# EAGLE board polarization_switch_mid (EAGLE 9.6.2)
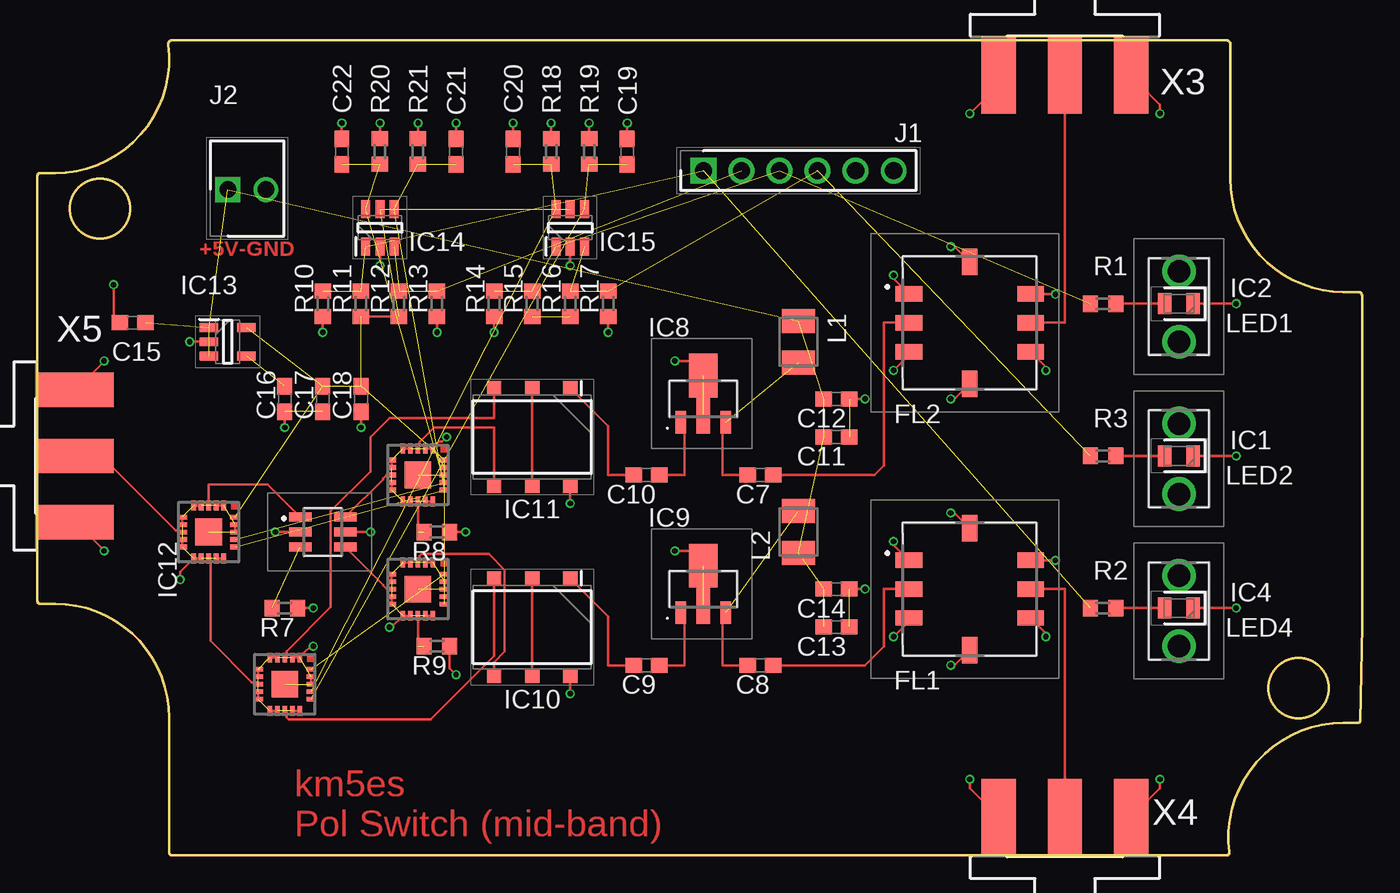
[diagram p0: board, top side]
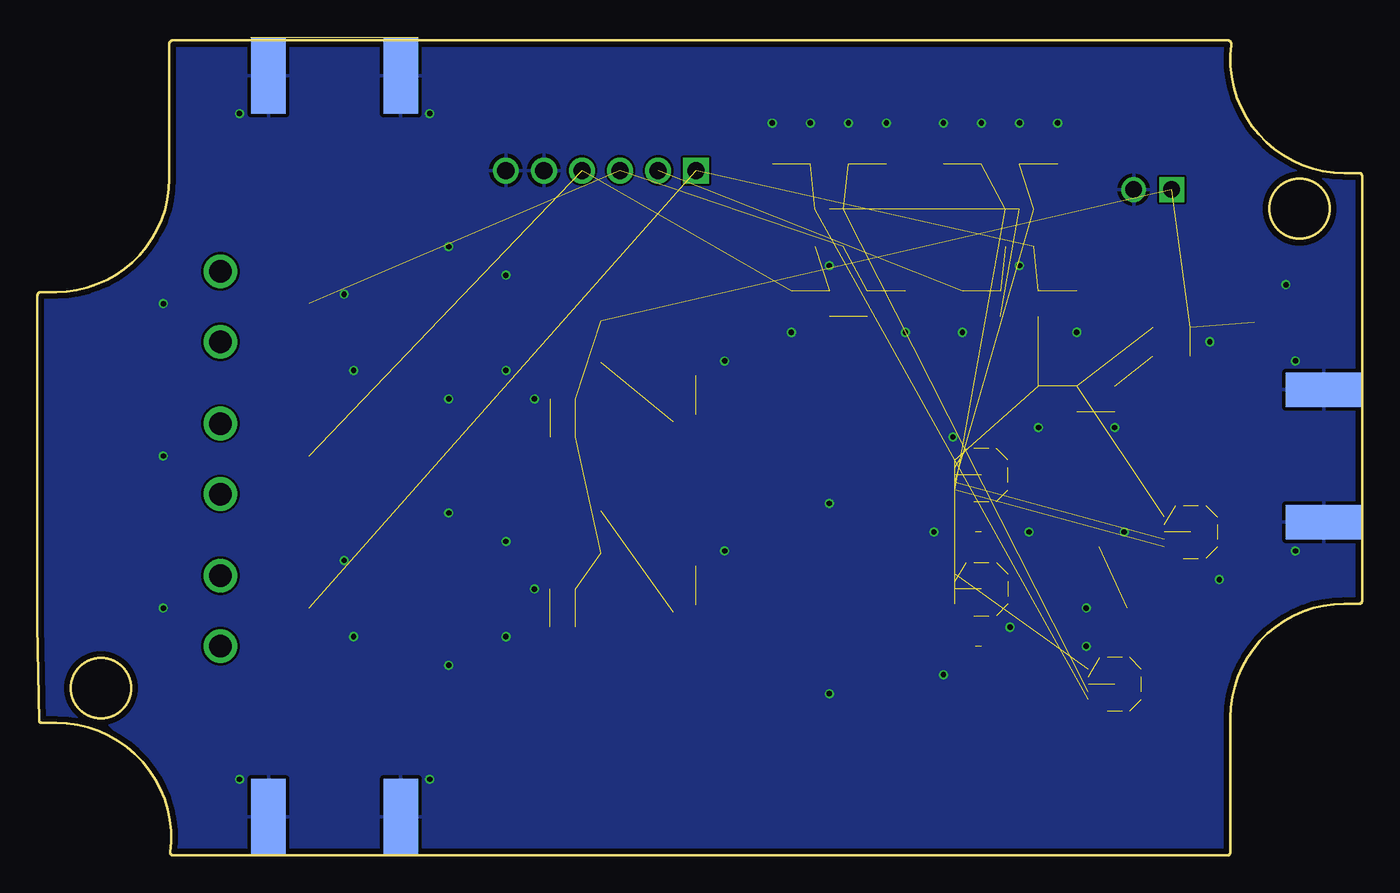
[diagram p1: board, bottom side, seen from below]

Size 88.42 x 54.42 mm. Coordinates in mm from the lower left corner, seen from the top.
Outline: 1.18,45.55 0.18,45.55 arc90 0,45.38 0,16.98 arc90 0.18,16.8 1.18,16.8 arc-90 8.8,9.18 8.8,0.18 arc90 8.98,0 79.38,0 arc97 79.55,0.2 arc-97 87.18,8.86 88.18,8.86 arc89 88.29,8.97 88.42,15.34 88.42,37.38 arc90 88.18,37.62 87.18,37.62 arc-90 79.62,45.18 79.62,54.18 arc90 79.38,54.42 8.98,54.42 arc99 8.74,54.14 arc-97 1.18,45.55
Outline: circle at 84.18,11.18 radius 2
Outline: circle at 4.18,43.18 radius 2
Copper layers (1*16): Top 0.035559375mm / dielectric 1.6mm / Bottom 0.035559375mm
Design rules "oshpark-2layer": minimum track width 6mil, minimum drill 10mil, track to track 6mil, track to pad 6mil, pad to pad 6mil, via to via 6mil, smd to smd 6mil, copper to edge 15mil, drill to drill 6mil, minimum pad ring 5mil, minimum via ring 5mil, stop-mask expansion 2.5mil, vias tented up to drill 0mil, thermal gap 10mil

## Footprints (pad centres in the part's own frame; a part is rotated, then mirrored left to right if it is on the bottom)
C0603 = smd 1.1 x 1: 1 -0.85,0; 2 0.85,0
RBP135 = smd 1.02 x 1.78: 1 -1.93,-4.065; 2 0,-4.065; 3 1.93,-4.065; 5 1.93,4.065; 6 0,4.065; 7 -1.93,4.065 | smd 1.78 x 1.02: 4 4.065,0; 8 -4.065,0
VLPR248582 = drill 1.5 pad 2.25: 1 0,0; 2 0,4.7
DG983-1 = smd 0.66 x 0.31: 1 -1.775,1; 2 -1.775,0.5; 3 -1.775,0; 4 -1.775,-0.5; 5 -1.775,-1; 11 1.775,-1; 12 1.775,-0.5; 13 1.775,0; 14 1.775,0.5; 15 1.775,1 | smd 0.31 x 0.66: 6 -1,-1.775; 7 -0.5,-1.775; 8 0,-1.775; 9 0.5,-1.775; 10 1,-1.775; 16 1,1.775; 17 0.5,1.775; 18 0,1.775; 19 -0.5,1.775; 20 -1,1.775 | smd 1.78 x 1.78: X 0,0
PHA13LN = smd 0.71 x 1.5: 1 -1.5,-1.56; 3 1.5,-1.56 | smd 0.91 x 2.5: 2 0,-1.06 | smd 1.91 x 2.92: 4 0,1.56
SOTFL254P691X411-6N = smd 0.935 x 0.96: 1 -3.262,2.54; 2 -3.262,0; 3 -3.262,-2.54; 4 3.262,-2.54; 5 3.262,0; 6 3.262,2.54
QCV151 = smd 0.6 x 1.5: 1 1,1.5; 2 0,1.5; 3 -1,1.5; 4 -1,-1.5; 5 0,-1.5; 6 1,-1.5
SOT95P280X145-5N = smd 1.25 x 0.6: 1 -1.25,0.95; 2 -1.25,0; 3 -1.25,-0.95; 4 1.25,-0.95; 5 1.25,0.95
SOT95P280X145-6N = smd 1.2 x 0.6: 1 -1.25,0.95; 2 -1.25,0; 3 -1.25,-0.95; 4 1.25,-0.95; 5 1.25,0; 6 1.25,0.95
HDRV6W66P0X254_1X6_1524X254X96 = drill 1.15 pad 1.725 square: 1 0,0 | drill 1.15 pad 1.725: 2 2.54,0; 3 5.08,0; 4 7.62,0; 5 10.16,0; 6 12.7,0
SHDR2W90P0X254_1X2_493X635X106 = drill 1.1 pad 1.65 square: 1 0,0 | drill 1.1 pad 1.65: 2 2.54,0
L3225M = smd 1.6 x 2.2: 1 -1.4,0; 2 1.4,0
LEDC2012X85N = smd 0.9 x 1.4: 1 -0.95,0; 2 0.95,0
R0603 = smd 1 x 1.1: 1 -0.85,0; 2 0.85,0
J502-ND-142-0701-801/806 = smd 5.08 x 2.286: 1 2.565,0; G@1 2.565,4.42; G@2 2.565,-4.42 | smd 5.08 x 2.286 bottom: G@3 2.565,4.42; G@4 2.565,-4.42

## Placement (x,y rotation side)
C7  2.2e-6  [C0603]  48.26,25.4 180 top
C8  2.2e-6  [C0603]  48.26,12.7 180 top
C9  2.2e-6  [C0603]  40.64,12.7 180 top
C10  2.2e-6  [C0603]  40.64,25.4 180 top
C11  10e-6  [C0603]  53.34,27.94 180 top
C12  1e-9  [C0603]  53.34,30.48 180 top
C13  10e-6  [C0603]  53.34,15.24 180 top
C14  1e-9  [C0603]  53.34,17.78 180 top
C15  1e-6  [C0603]  6.35,35.56 180 top
C16  0.01e-6  [C0603]  16.51,30.48 270 top
C17  3.3e-6  [C0603]  19.05,30.48 270 top
C18  100e-12  [C0603]  21.59,30.48 270 top
C19  100e-12  [C0603]  39.37,46.99 270 top
C20  100e-12  [C0603]  31.75,46.99 90 top
C21  100e-12  [C0603]  27.94,46.99 270 top
C22  100e-12  [C0603]  20.32,46.99 90 top
FL1  RBP-135+  [RBP135]  62.23,17.78 270 top
FL2  RBP-135+  [RBP135]  62.23,35.56 270 top
IC1  VLPR-24-858-2  [VLPR248582]  76.2,24.13 0 top
IC2  VLPR-24-858-2  [VLPR248582]  76.2,34.29 0 top
IC3  HSWA2-30DR+  [DG983-1]  11.43,21.59 270 top
IC4  VLPR-24-858-2  [VLPR248582]  76.2,13.97 0 top
IC5  HSWA2-30DR+  [DG983-1]  16.51,11.43 270 top
IC6  HSWA2-30DR+  [DG983-1]  25.4,25.4 270 top
IC7  HSWA2-30DR+  [DG983-1]  25.4,17.78 270 top
IC8  PHA-13LN+  [PHA13LN]  44.45,30.48 0 top
IC9  PHA-13LN+  [PHA13LN]  44.45,17.78 0 top
IC10  ADP-2-1+_MINICIRCUITS  [SOTFL254P691X411-6N]  33.02,15.24 270 top
IC11  ADP-2-1+_MINICIRCUITS  [SOTFL254P691X411-6N]  33.02,27.94 270 top
IC12  QCV-151+  [QCV151]  19.05,21.59 90 top
IC13  MAX8878EUK28+T  [SOT95P280X145-5N]  12.7,34.29 0 top
IC14  SN74LVC2G17DBVT  [SOT95P280X145-6N]  22.86,41.91 90 top
IC15  SN74LVC2G17DBVT  [SOT95P280X145-6N]  35.56,41.91 90 top
J1  M20-9730645  [HDRV6W66P0X254_1X6_1524X254X96]  44.45,45.72 0 top
J2  171856-0002  [SHDR2W90P0X254_1X2_493X635X106]  12.7,44.45 0 top
L1  15e-6  [L3225M]  50.8,34.29 270 top
L2  15e-6  [L3225M]  50.8,21.59 90 top
LED1  APT2012LZGCK  [LEDC2012X85N]  76.2,36.83 180 top
LED2  APT2012LZGCK  [LEDC2012X85N]  76.2,26.67 180 top
LED4  APT2012LZGCK  [LEDC2012X85N]  76.2,16.51 180 top
R1  430  [R0603]  71.12,36.83 0 top
R2  430  [R0603]  71.12,16.51 0 top
R3  430  [R0603]  71.12,26.67 0 top
R7  50  [R0603]  16.51,16.51 180 top
R8  50  [R0603]  26.67,21.59 180 top
R9  50  [R0603]  26.67,13.97 180 top
R10  10e6  [R0603]  19.05,36.83 90 top
R11  1e6  [R0603]  21.59,36.83 90 top
R12  1e6  [R0603]  24.13,36.83 90 top
R13  10e6  [R0603]  26.67,36.83 90 top
R14  10e6  [R0603]  30.48,36.83 90 top
R15  1e6  [R0603]  33.02,36.83 90 top
R16  1e6  [R0603]  35.56,36.83 90 top
R17  10e6  [R0603]  38.1,36.83 90 top
R18  10e3  [R0603]  34.29,46.99 90 top
R19  10e3  [R0603]  36.83,46.99 90 top
R20  10e3  [R0603]  22.86,46.99 90 top
R21  10e3  [R0603]  25.4,46.99 90 top
X3  SMA-142-0701-801/806  [J502-ND-142-0701-801/806]  68.58,54.61 270 top
X4  SMA-142-0701-801/806  [J502-ND-142-0701-801/806]  68.58,0 90 top
X5  SMA-142-0701-801/806  [J502-ND-142-0701-801/806]  0,26.67 0 top

## Library data of the parts
C7-C22 = rcl; SPICEPREFIX: C
FL1 FL2 = RBP-135+; DESCRIPTION: Metal Shield Bandpass Filter; HEIGHT: 2.54mm; MANUFACTURER_NAME: Mini-Circuits; MANUFACTURER_PART_NUMBER: RBP-135+
IC1 IC2 IC4 = VLPR-24-858-2; DESCRIPTION: LED Light Pipes Light Pipe Vert SMD Rect Face; HEIGHT: 21mm; MANUFACTURER_NAME: Bivar; MANUFACTURER_PART_NUMBER: VLPR-24-858-2; RS_PART_NUMBER: 9063748; RS_PRICE-STOCK: http://uk.rs-online.com/web/p/products/9063748
IC3 IC5-IC7 = minicircuits; OC_FARNELL: unknown; OC_NEWARK: unknown
IC8 IC9 = PHA-13LN+; DESCRIPTION: ic; HEIGHT: 1.6mm; MANUFACTURER_NAME: Mini Circuits; MANUFACTURER_PART_NUMBER: PHA-13LN+
IC10 IC11 = ADP-2-1+_MINICIRCUITS; DESCRIPTION: Power Splitter/Combiner; HEIGHT: 4.11mm; MANUFACTURER_NAME: Mini-Circuits; MANUFACTURER_PART_NUMBER: ADP-2-1+ MINICIRCUITS
IC12 = QCV-151+; DESCRIPTION: 2 Way-90 Power Splitter; HEIGHT: 1.652mm; MANUFACTURER_NAME: Mini-Circuits; MANUFACTURER_PART_NUMBER: QCV-151+
IC13 = MAX8878EUK28+T; DESCRIPTION: LDO Voltage Regulators Low-Noise, Low-Dropout, 150mA Linear Regulators with 2982 Pinout; HEIGHT: 1.45mm; MANUFACTURER_NAME: Maxim Integrated; MANUFACTURER_PART_NUMBER: MAX8878EUK28+T
IC14 IC15 = SN74LVC2G17DBVT; DESCRIPTION: DUAL SCHMITT-TRIGGER BUFFER; HEIGHT: 1.45mm; MANUFACTURER_NAME: Texas Instruments; MANUFACTURER_PART_NUMBER: SN74LVC2G17DBVT; MOUSER_PART_NUMBER: 595-SN74LVC2G17DBVT; MOUSER_PRICE-STOCK: https://www.mouser.com/Search/Refine.aspx?Keyword=595-SN74LVC2G17DBVT; RS_PART_NUMBER: 6628944P; RS_PRICE-STOCK: http://uk.rs-online.com/web/p/products/6628944P
J1 = M20-9730645; DESCRIPTION: Headers & Wire Housings 06 SIL VERTICAL PIN HEADER GOLD HT; HEIGHT: 9.64mm; MANUFACTURER_NAME: HARWIN; MANUFACTURER_PART_NUMBER: M20-9730645; MOUSER_PART_NUMBER: 855-M20-9730645; MOUSER_PRICE-STOCK: https://www.mouser.com/Search/Refine.aspx?Keyword=855-M20-9730645
J2 = 171856-0002; ALLIED_NUMBER: 70314268; ALLIED_PRICE-STOCK: https://www.alliedelec.com/molexincorporated-171856-0002/70314268/; DESCRIPTION: KK 254 RPC Pin Header friction lock 2way Molex KK 254 Series, Series Number 171856, 2.54mm Pitch 2 Way 1 Row Straight PCB Header, Through Hole; HEIGHT: 10.61mm; MANUFACTURER_NAME: Molex; MANUFACTURER_PART_NUMBER: 171856-0002; MOUSER_PART_NUMBER: 538-171856-0002; MOUSER_PRICE-STOCK: https://www.mouser.com/Search/Refine.aspx?Keyword=538-171856-0002; RS_PART_NUMBER: 7922884P; RS_PRICE-STOCK: http://uk.rs-online.com/web/p/products/7922884P
L1 L2 = rcl; SPICEPREFIX: L
LED1 LED2 LED4 = APT2012LZGCK; ALLIED_NUMBER: 71056205; ALLIED_PRICE-STOCK: https://www.alliedelec.com/kingbright-apt2012lzgck/71056205/; DESCRIPTION: Standard LEDs - SMD 2.0X1.2MM LOW CRNT; HEIGHT: 0.85mm; MANUFACTURER_NAME: Kingbright; MANUFACTURER_PART_NUMBER: APT2012LZGCK; MOUSER_PART_NUMBER: 604-APT2012LZGCK; MOUSER_PRICE-STOCK: https://www.mouser.com/Search/Refine.aspx?Keyword=604-APT2012LZGCK
R1-R3 R7-R21 = rcl; SPICEPREFIX: R
X3-X5 = sma-flange_375mils; MF: JOHNSON COMPONENTS; MPN: 142-0701-801; OC_FARNELL: 1608592; OC_NEWARK: 90F2624

## Nets
GND: C11.1 C12.1 C13.1 C14.1 C15.2 C16.2 C17.2 C18.2 C19.1 C20.2 C21.1 C22.2 FL1.1 FL1.3 FL1.4 FL1.5 FL1.7 FL1.8 FL2.1 FL2.3 FL2.4 FL2.5 FL2.7 FL2.8 IC3.1 IC3.2 IC3.4 IC3.5 IC3.6 IC3.7 IC3.9 IC3.10 IC3.11 IC3.12 IC3.14 IC3.15 IC3.18 IC3.19 IC3.X IC5.1 IC5.2 IC5.4 IC5.5 IC5.6 IC5.7 IC5.9 IC5.10 IC5.11 IC5.12 IC5.14 IC5.15 IC5.18 IC5.19 IC5.X IC6.1 IC6.2 IC6.4 IC6.5 IC6.6 IC6.7 IC6.9 IC6.10 IC6.11 IC6.12 IC6.14 IC6.15 IC6.18 IC6.19 IC6.X IC7.1 IC7.2 IC7.4 IC7.5 IC7.6 IC7.7 IC7.9 IC7.10 IC7.11 IC7.12 IC7.14 IC7.15 IC7.18 IC7.19 IC7.X IC8.2 IC8.4 IC9.2 IC9.4 IC10.6 IC11.6 IC12.2 IC12.5 IC13.2 IC14.2 IC15.2 J1.5 J1.6 J2.2 LED1.1 LED2.1 LED4.1 R7.1 R8.1 R9.1 R10.1 R13.1 R14.1 R17.1 R18.2 R19.2 R20.2 R21.2 X3.G@1 X3.G@2 X3.G@3 X3.G@4 X4.G@1 X4.G@2 X4.G@3 X4.G@4 X5.G@1 X5.G@2 X5.G@3 X5.G@4
N$1: LED2.2 R3.2
N$2: LED1.2 R1.2
N$3: LED4.2 R2.2
N$4: IC5.13 IC10.3
N$5: IC3.8 X5.1
N$6: C10.2 IC11.1
N$7: IC7.3 IC10.4
N$8: C20.1 IC5.17 IC15.6 R18.1
N$9: IC7.8 IC12.4
N$13: C10.1 IC8.1
N$14: IC3.3 IC12.1
N$15: IC3.13 IC5.8
N$16: IC6.8 IC12.6
N$18: IC6.3 IC11.4
N$19: IC6.13 R8.2
N$20: C7.2 IC8.3 L1.2
N$21: C9.2 IC10.1
N$22: IC11.2 IC11.5
N$23: IC5.3 IC11.3
N$25: IC10.2 IC10.5
N$26: C9.1 IC9.1
N$27: C8.2 IC9.3 L2.2
N$28: C7.1 FL2.2
N$29: FL2.6 X3.1
N$30: C8.1 FL1.2
N$31: FL1.6 X4.1
N$32: IC12.3 R7.2
N$35: IC7.13 R9.2
N$36: C11.2 C12.2 C13.2 C14.2 C15.1 IC13.1 IC13.3 J2.1 L1.1 L2.1
N$37: IC14.1 J1.1 R2.1 R10.2 R11.2
N$38: C19.2 IC5.16 IC15.4 R19.1
N$39: C17.1 C18.1 IC3.20 IC5.20 IC6.20 IC7.20 IC13.5 IC14.5 IC15.5 R11.1 R12.1
N$40: C16.1 IC13.4
N$42: C22.1 IC3.17 IC6.17 IC7.17 IC14.6 R20.1
N$43: IC14.3 J1.2 R12.2 R13.2
N$44: IC15.1 J1.3 R1.1 R14.2 R15.2
N$45: IC15.3 J1.4 R3.1 R16.2 R17.2
N$46: C21.2 IC3.16 IC6.16 IC7.16 IC14.4 R21.1
N$48: R15.1 R16.1

## Tracks (layer width: path | path; a pad name or v marks a point on that pad's centre or on a via)
GND  (via drill 0.35)  (33 unrouted)
  Top 0.152: R9.1 27.52,12.48 v27.94,12.06 | R7.1 v18.41,16.51 | IC12.5 v22.23,21.59 | R8.1 v28.57,21.59 | IC5.15 IC5.14 | IC5.12 IC5.11 | IC5.10 IC5.9 | IC5.7 IC5.6 | IC5.5 IC5.4 | IC5.2 IC5.1 17.78,13.48 17.78,13.53 18.23,13.97 v18.41,13.97 | IC5.18 IC5.19 | IC7.9 IC7.10 | IC7.7 IC7.6 | IC7.5 IC7.4 | IC7.2 IC7.1 | IC7.19 IC7.18 | IC7.12 IC7.11 23.64,15.24 v23.5,15.24 | IC7.14 IC7.15 | IC3.12 IC3.11 9.53,18.91 v9.53,18.41 | IC3.14 IC3.15 | IC3.18 IC3.19 | IC3.9 IC3.10 | IC3.7 IC3.6 | IC3.4 IC3.5 | IC3.2 IC3.1 | IC12.2 v15.88,21.59 | IC6.5 IC6.4 | IC6.2 IC6.1 26.67,27.45 26.67,27.5 26.8,27.63 26.99,27.63 v27.3,27.94 | IC6.19 IC6.18 | IC6.7 IC6.6 | IC6.9 IC6.10 | IC6.11 IC6.12 | IC6.14 IC6.15 | R10.1 v19.05,34.92 | R13.1 v26.67,34.92 | R14.1 v30.48,34.92 | R17.1 v38.1,34.92 | C22.2 v20.32,48.9 | R20.2 v22.86,48.9 | R21.2 v25.4,48.9 | C21.1 v27.94,48.9 | C20.2 v31.75,48.9 | R18.2 v34.29,48.9 | R19.2 v36.83,48.9 | C19.1 v39.37,48.9 | IC14.2 v22.86,39.37 | IC15.2 v35.56,39.37 | C15.2 5.08,35.98 v5.08,38.1 | X5.G@1 4.45,32.97 v4.45,33.02 | X5.G@4 4.45,20.37 v4.45,20.32 | IC13.2 v10.16,34.29 | C16.2 v16.51,28.57 | C18.2 v21.59,28.57 | IC11.6 v35.56,23.5 | IC10.6 v35.56,10.79 | IC9.4 43.47,20.32 v42.55,20.32 | IC8.4 43.47,33.02 v42.55,33.02 | C12.1 v55.24,30.48 | C14.1 v55.24,17.78 | FL2.8 61.22,40.64 v60.96,40.64 | FL1.8 61.22,22.86 v60.96,22.86 | FL1.1 57.15,20.73 v57.15,20.95 | FL1.3 58.16,15.62 v57.15,14.61 | FL1.4 61.22,12.7 v60.96,12.7 | FL1.5 67.31,14.84 v67.31,14.61 | FL1.7 66.32,19.68 v67.94,19.68 | FL2.1 57.15,38.51 v57.15,38.73 | FL2.3 58.16,33.4 v57.15,32.38 | FL2.4 61.22,30.48 v60.96,30.48 | FL2.5 67.31,32.62 v67.31,32.38 | FL2.7 66.32,37.47 v67.94,37.47 | LED1.1 v80.01,36.83 | LED2.1 v80.01,26.67
  Top 0.152: LED4.1 v80.01,16.51 | X4.G@1 62.23,4.5 v62.23,5.08 | X4.G@4 74.93,4.5 v74.93,5.08 | X3.G@4 64.16,51.46 v62.23,49.53 | X3.G@1 74.93,50.11 v74.93,49.53
  pour Bottom: 0,16.51 8.89,7.62 8.89,0 80.01,0 81.28,1.27 81.28,6.35 83.82,8.89 88.9,8.89 88.9,38.1 85.09,38.1 80.01,43.18 80.01,54.61 8.89,54.61 7.62,53.34 5.08,50.8 5.08,46.99 3.81,45.72 0,45.72
N$1
  Top 0.152: R3.2 LED2.2
N$2
  Top 0.152: R1.2 LED1.2
N$3
  Top 0.152: R2.2 LED4.2
N$4
  Top 0.152: IC5.13 16.63,9.54 16.63,9.23 16.76,9.1 26.24,9.1 30.48,13.34 IC10.3
N$5
  Top 0.152: IC3.8 9.54,21.71 9.23,21.71 4.27,26.67 X5.1
N$6
  Top 0.152: IC11.1 38.1,28.66 38.1,25.4 C10.2
N$7
  Top 0.152: IC10.4 30.48,12.9 31.19,13.61 31.19,19.06 30.14,20.11 25.65,20.11 25.52,19.98 25.52,19.67 IC7.3
N$8  (3 unrouted)
N$9
  Top 0.152: IC12.4 23.07,18.07 23.07,18.03 23.32,17.78 IC7.8
N$13
  Top 0.152: C10.1 43.18,25.4 43.18,28.69 IC8.1
N$14
  Top 0.152: IC12.1 15.38,24.77 11.43,24.77 IC3.3
N$15
  Top 0.152: IC3.13 11.55,19.7 11.55,14.31 14.31,11.55 14.62,11.55 IC5.8
N$16
  Top 0.152: IC12.6 23.07,25.11 23.07,25.15 23.32,25.4 IC6.8
N$18
  Top 0.152: IC6.3 25.52,27.29 25.52,27.6 26.49,28.57 30.48,28.57 IC11.4
N$19  (1 unrouted)
  Top 0.152: IC6.13 25.4,21.59
N$20  (1 unrouted)
  Top 0.152: C7.2 45.72,25.4 45.72,28.69 IC8.3
N$21
  Top 0.152: IC10.1 38.1,15.96 38.1,12.7 C9.2
N$22
  Top 0.152: IC11.2 IC11.5
N$23
  Top 0.152: IC5.3 16.63,13.32 16.63,13.63 19.57,16.57 19.57,22.98 22.23,25.64 22.23,27.94 23.5,29.21 30.48,29.21 IC11.3
N$25
  Top 0.152: IC10.2 IC10.5
N$26
  Top 0.152: C9.1 43.18,12.7 43.18,15.99 IC9.1
N$27  (1 unrouted)
  Top 0.152: IC9.3 45.72,15.99 45.72,12.7 C8.2
N$28
  Top 0.152: C7.1 55.88,25.4 56.52,26.04 56.52,35.56 FL2.2
N$29
  Top 0.152: FL2.6 68.58,35.56 X3.1
N$30
  Top 0.152: C8.1 55.24,12.7 56.52,13.97 56.52,17.78 FL1.2
N$31
  Top 0.152: FL1.6 68.58,17.78 X4.1
N$32  (1 unrouted)
N$35  (1 unrouted)
  Top 0.152: IC7.13 25.4,13.97
N$36  (9 unrouted)
N$37  (4 unrouted)
N$38  (3 unrouted)
N$39  (9 unrouted)
  Top 0.152: R11.1 R12.1
N$40  (1 unrouted)
N$42  (5 unrouted)
N$43  (3 unrouted)
N$44  (4 unrouted)
N$45  (4 unrouted)
N$46  (5 unrouted)
N$48  (1 unrouted)

## Text on the board
Top: +5V-GND | km5es / Pol Switch (mid-band)